# Altium PCB Sensorboard.PcbDoc
Units mm, origin at the board's own origin, x right, y up, seen from the top; angles counter-clockwise.
Board outline 26.67 x 26.67 mm, 2 copper layers (Top Layer, Bottom Layer), stack 1.586 mm thick; 47 components, 14 nets, 105 pads, 27 vias.
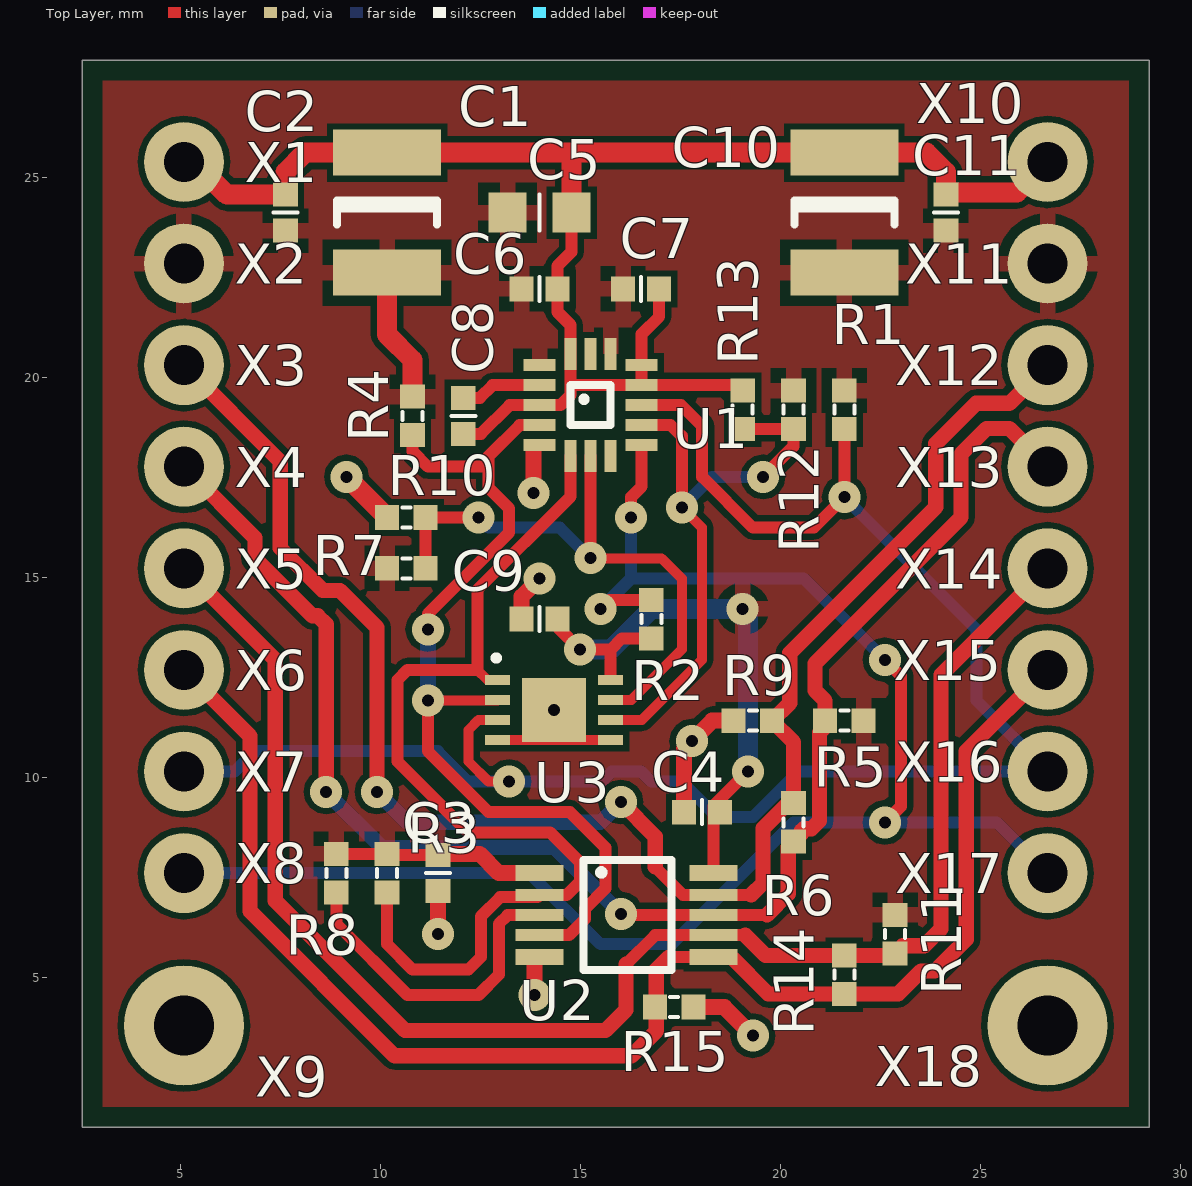
[diagram p0: Top Layer view]
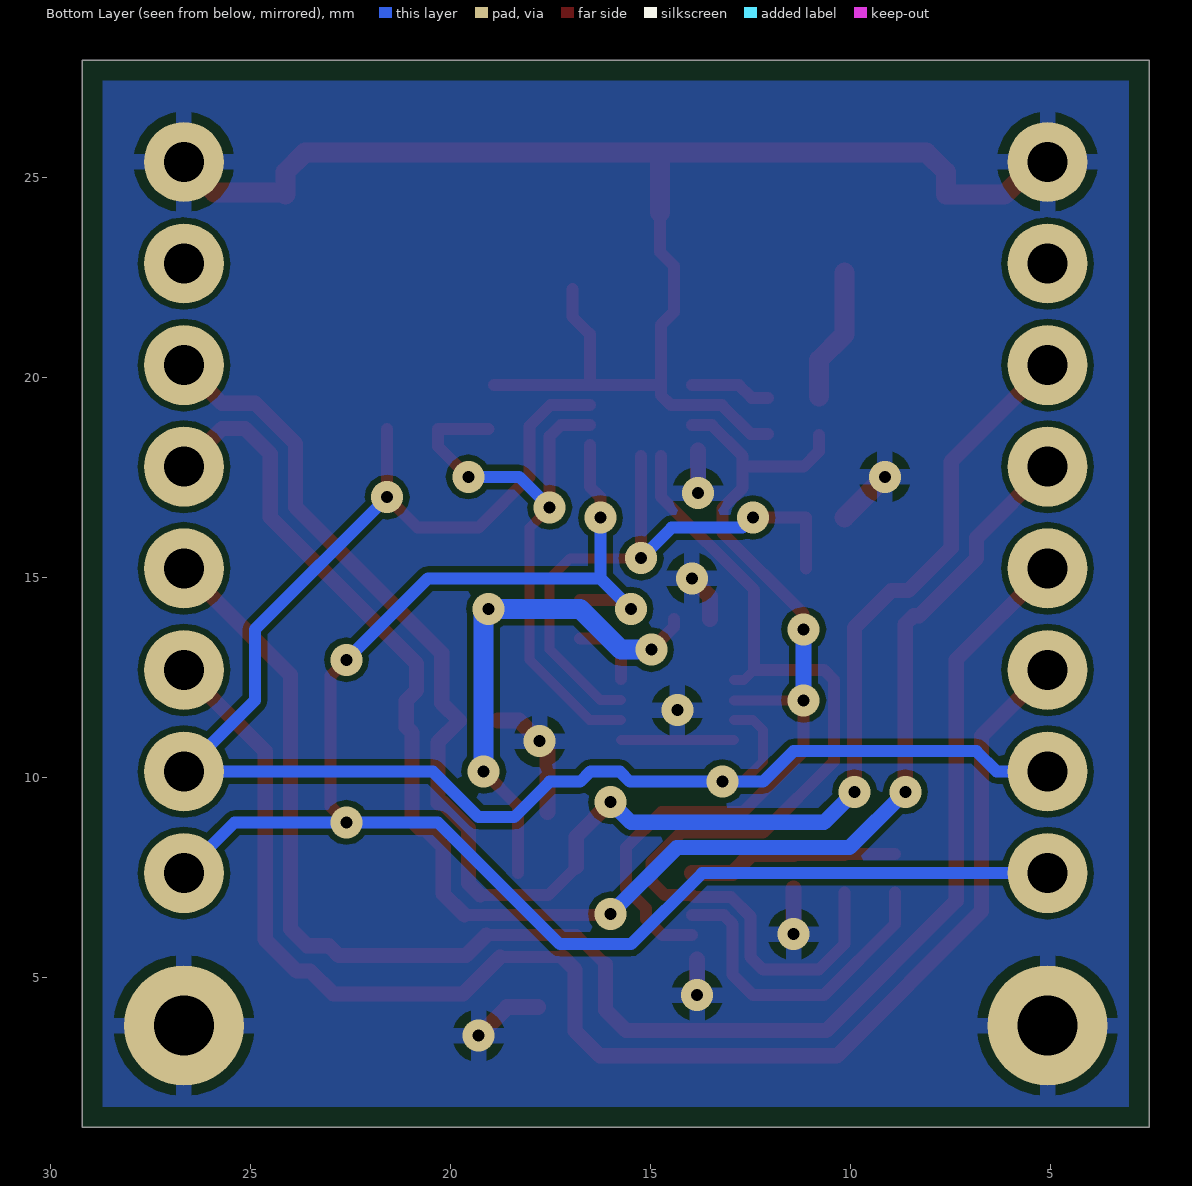
[diagram p1: Bottom Layer view, seen from below]

## Layer stack, top to bottom
Top Solder: solder mask 0.0102, Solder Resist, Dk 3.5
Top Layer: signal copper 0.018
Dielectric1: core 1.55, FR-4, Dk 4.8
Bottom Layer: signal copper 0.018
Bottom Solder: solder mask 0.0102, Solder Resist, Dk 3.5

## Board outline
2.54,1.27 2.54,27.94 29.21,27.94 29.21,1.27

## Design rules (kind name [scope] priority, off if disabled: settings)
Clearance Clearance-xPP-xTP-xTT [All] p1: gap=0.15
ComponentClearance [All] p1: gap=0.25 collisioncheckmode=3 verticalgap=0.25 showdistances=FALSE
DiffPairsRouting [All] p1: maxlimit=0.25 minlimit=0.25 mostfreqgap=0.25 toplayer_minwidth=0.381 toplayer_maxwidth=0.381 toplayer_prefwidth=0.381 bottomlayer_minwidth=0.381 bottomlayer_maxwidth=0.381 bottomlayer_prefwidth=0.381 maxuncoupledlength=12.5
Height [All] p1: minheight=0 maxheight=25 prefheight=12.5
HoleSize HoleSize-PTH [All] p1: absolutevalues=TRUE maxlimit=2 minlimit=0.25 maxpercent=80.000 minpercent=20.000
HoleToHoleClearance [All] p1: gap=0.15 allowstackedmicrovias=TRUE
MinimumAnnularRing "Minimum IAR  >0.45mm" [((ObjectKind = 'Pad') OR (ObjectKind = 'Via')) And (Layer = 'MultiLayer') And (HoleDiameter > AsMM(0.45))] p1: minimumring=0.25 // minimum inner annular ring for pads > 0.45mm finished hole size
MinimumAnnularRing "Minimum IAR <=0.45mm" [((ObjectKind = 'Pad') OR (ObjectKind = 'Via')) And (Layer = 'MultiLayer') And (HoleDiameter <= AsMM(0.45))] p2: minimumring=0.225 // minimum inner annular ring for pads <= 0.45mm finished hole size
MinimumSolderMaskSliver [All] p1: minsoldermaskwidth=0.1
PlaneClearance PlaneClearance-IPI [All] p1: clearance=0.4
PlaneConnect [All] p1: planeconnectstyle=Relief reliefexpansion=0.4 reliefentries=4 reliefconductorwidth=0.2 reliefairgap=0.2
PolygonConnect PolygonConnect-xTW [All] p1: connectstyle=Relief reliefconductorwidth=0.4 reliefentries=4 polygonreliefangle="90 Angle" airgapwidth=0.254
RoomDefinition Sensorboard [InComponentClass('Sensorboard')] p1: confinementstyle=ConfineIn formatcopy=TRUE lockcomponents=FALSE outline 0,0.48 29.21,0.48 29.21,27.94 0,27.94
RoutingCorners [All] p1: cornerstyle=45-Degree minsetback=2.5 maxsetback=2.5
RoutingVias "RoutingVias > 0.45mm" [(ObjectKind = 'Via') And (HoleDiameter > AsMM(0.45))] p1: holewidth=0.5 width=1 viastyle="Through Hole" minholewidth=0.45 minwidth=0.95 maxholewidth=0.9 maxwidth=1.4 // finishet hole size > 0.45mm
RoutingVias "RoutingVias <= 0.45mm" [(ObjectKind = 'Via') And (HoleDiameter <= AsMM(0.45))] p2: holewidth=0.3 width=0.8 viastyle="Through Hole" minholewidth=0.25 minwidth=0.7 maxholewidth=0.5 maxwidth=1 // finishet hole size <= 0.45mm
SilkToSilkClearance [All] p1: silktosilkclearance=0.2
SilkToSolderMaskClearance SilkscreenOverComponentPads [IsPad] p1: minsilkscreentomaskgap=0.2 clearancetoexposedcopper=TRUE
SolderMaskExpansion [All] p1: expansion=0.1
UnpouredPolygon [All] p1: allowunpoured=FALSE
Width Width-xTW [All] p1: maxlimit=1.5 minlimit=0.15 preferedwidth=0.2
18 further rules are at their usual default settings.

## Classes and differential pairs
differential pair DSDA: +DSDA_P -DSDA_N
differential pair DSCL: +DSCL_P -DSCL_N

## Components (designator, comment, footprint, x,y, rotation, side; value= is the part's Value field where it differs from the comment)
C1 "100uF" CAPC3225[1210]X120 10.16,24.13 r270 top
C2 "100nF" CAPC1005[0402]X50 7.62,24.13 r270 top
C3 "100nF" CAPC1005[0402]X50 11.43,7.62 r90 top
C4 "100nF" CAPC1005[0402]X50 18.034,9.144 r0 top
C5 "4.7uF" CAPC1608[0603]X80 13.97,24.13 r180 top
C6 "100nF" CAPC1005[0402]X50 13.97,22.225 r180 top
C7 "100nF" CAPC1005[0402]X50 16.51,22.225 r180 top
C8 "100nF" CAPC1005[0402]X50 12.065,19.05 r90 top
C9 "100nF" CAPC1005[0402]X50 13.97,13.97 r0 top
C10 "100uF" CAPC3225[1210]X120 21.59,24.13 r270 top
C11 "100nF" CAPC1005[0402]X50 24.13,24.13 r270 top
R1 "100k" RESC1005[0402]X35 21.59,19.205 r90 top
R2 "100k" RESC1005[0402]X35 16.764,13.97 r270 top
R3 "4k7" RESC1005[0402]X35 10.16,7.62 r90 top
R4 "4k7" RESC1005[0402]X35 10.795,19.05 r90 top
R5 "390" RESC1005[0402]X35 21.59,11.43 r0 top
R6 "120" RESC1005[0402]X35 20.32,8.89 r270 top
R7 "0" RESC1005[0402]X35 10.64,15.24 r180 top
R8 "100k" RESC1005[0402]X35 8.89,7.62 r270 top
R9 "390" RESC1005[0402]X35 19.304,11.43 r0 top
R10 "0" RESC1005[0402]X35 10.64,16.51 r180 top
R11 "390" RESC1005[0402]X35 22.86,6.096 r90 top
R12 "0" RESC1005[0402]X35 20.32,19.205 r90 top
R13 "0" RESC1005[0402]X35 19.05,19.205 r90 top
R14 "120" RESC1005[0402]X35 21.59,5.08 r90 top
R15 "390" RESC1005[0402]X35 17.337,4.27 r180 top
U1 "FXLS8471Q" "16 LEAD QFN" 13.97,20.32 r0 top
U2 "PCA9615" TSSOP10 13.97,7.62 r270 top
U3 "PCT2075TP" HWSON8 15.748,12.446 r270 top
X1 "Loch" Loch 5.08,25.4 r0 top
X2 "Loch" Loch 5.08,22.86 r0 top
X3 "Loch" Loch 5.08,20.32 r0 top
X4 "Loch" Loch 5.08,17.78 r0 top
X5 "Loch" Loch 5.08,15.24 r0 top
X6 "Loch" Loch 5.08,12.7 r0 top
X7 "Loch" Loch 5.08,10.16 r0 top
X8 "Loch" Loch 5.08,7.62 r0 top
X9 "Loch" "Loch _gross" 5.08,3.81 r0 top
X10 "Loch" Loch 26.67,25.4 r0 top
X11 "Loch" Loch 26.67,22.86 r0 top
X12 "Loch" Loch 26.67,20.32 r0 top
X13 "Loch" Loch 26.67,17.78 r0 top
X14 "Loch" Loch 26.67,15.24 r0 top
X15 "Loch" Loch 26.67,12.7 r0 top
X16 "Loch" Loch 26.67,10.16 r0 top
X17 "Loch" Loch 26.67,7.62 r0 top
X18 "Loch" "Loch _gross" 26.67,3.81 r0 top

## Footprints (in the part's own frame and the unit in brackets; to place one, negate y for a bottom-side part, rotate by r counter-clockwise, add the part's x,y. Pads: shape width x height; smd on the part's side, far side on the other; paste and mask are expansions set on the pad)
"16 LEAD QFN" [mm]
  rect 0.8x0.3 smd paste-0.015 mask+0.113: 1(0,0) 2(0,-0.5) 3(0,-1) 4(0,-1.5) 5(0,-2) 9(2.55,-2) 10(2.55,-1.5) 11(2.55,-1) 12(2.55,-0.5) 13(2.55,0)
  rect 0.3x0.8 smd paste-0.015 mask+0.113: 6(0.775,-2.275) 7(1.275,-2.275) 8(1.775,-2.275) 14(1.775,0.275) 15(1.275,0.275) 16(0.775,0.275)
  silkscreen extent 0.77,-1.5 1.78,-0.5
CAPC1005[0402]X50 [mm] "Chip Capacitor; 1.0x0.5mm"
  rect 0.6x0.62 smd: 1(-0.45,0) 2(0.45,0)
  silkscreen extent 0,-0.3 0,0.3, body extent -0.5,-0.25 0.5,0.25, height 0.5
CAPC1608[0603]X80 [mm] "Chip Capacitor; 1.6x0.8mm"
  rect 0.95x1 smd: 1(-0.8,0) 2(0.8,0)
  silkscreen extent 0,-0.45 0,0.45, body extent -0.8,-0.4 0.8,0.4, height 0.8
CAPC3225[1210]X120 [mm] "Chip Capacitor; 3.2x2.5 mm"
  rect 1.15x2.7 smd: 1(-1.5,0) 2(1.5,0)
  silkscreen extent -0.3,-1.25 0.3,1.25, body extent -1.6,-1.25 1.6,1.25, height 1.2
HWSON8 [mm]
  rect 0.25x0.625 smd: 1(0,-2.825) 2(0.5,-2.825) 3(1,-2.825) 4(1.5,-2.825) 5(1.5,0) 6(1,0) 7(0.5,0) 8(0,0)
  rect 1.6x1.6 smd paste-0.5: 9(0.75,-1.412)
  silkscreen extent -0.56,-2.87 -0.54,-2.85
Loch [mm] "Loch um Kabel einzulöten"
  round 2 hole 1 mask+0.113: 1(0,0)
"Loch _gross" [mm] "Loch um Kabel einzulöten"
  round 3 hole 1.5 mask+0.113: 1(0,0)
RESC1005[0402]X35 [mm] "Chip Resistor; 1x0.5mm"
  rect 0.6x0.62 smd: 1(-0.48,0) 2(0.48,0)
  silkscreen extent -0.1,-0.25 0.1,0.25, body extent -0.5,-0.25 0.5,0.25, height 0.35
TSSOP10 [mm]
  rect 0.4x1.2 smd: 1(0,0) 5(2.1,0) 6(2.1,4.35) 10(0,4.35)
  rect 0.3x1.2 smd: 2(0.55,0) 3(1.05,0) 4(1.55,0) 7(1.55,4.35) 8(1.05,4.35) 9(0.55,4.35)
  silkscreen extent -0.33,1.1 2.42,3.3

## Part data
C1 C2 C3 C4 C5 C6 C7 C8 C9 C10 C11: library part C, "Capacitor"
R1 R2 R3 R4 R5 R6 R7 R8 R9 R10 R11 R12 R13 R14 R15: library part R, "Resistor"
U1: "3-Axis,  Linear Accelerometer"
U2: "differential I2C-bus buffer"
U3: "Temperature_Sensor"
X1 X2 X3 X4 X5 X6 X7 X8 X9 X10 X11 X12 X13 X14 X15 X16 X17 X18: "Loch in Print um Kabel einzulöten"

## Via types
v1: diameter 0.8, hole 0.3, Top Layer to Bottom Layer, 27 vias

## Nets (pads, with @x,y where several pads share a name; then routed paths per layer and width w, separated by ;. In a path a pad name is that pad's centre, name@x,y a point inside that pad or via, vN(x,y) a via of type N, cw(c..) or ccw(c..) an arc to the next point about the centre after c; other vN are vias at no path point)
3V3: C1.2 C2.2 C3.2 C4.2 C5.2 C6.2 C7.2 C9.2 C10.2 C11.2 R1.2 R2.2 R3.2 R4.2 R5.2 R7.2 R8.1 R11.2 R12.2 U1.1 U1.14 U2.1 U2.10 U3.8 X2.1 X11.1 | length 23.7
  Top Layer w0.3: R8.1 R3.2@10.13,8.1 ; R3.2@10.16,8.07 C3.2@11.4,8.07 ; C9.2 14.42,13.774 v1(14.986,13.208) 15.748,13.208 ; U3.8@15.748,12.471 15.748,13.208 ; R2.2 16.03,13.49 15.748,13.208 ; U2.10 18.32,9.303 v1(19.177,10.16)
  Top Layer w0.4: C3.2@11.43,8.1 12.474,8.1 12.954,7.62 U2.1
  Top Layer w0.5: C1.2 10.16,21.082 10.795,20.447 R4.2
  Bottom Layer w0.5: v1(14.986,13.208) 15.748,13.208 16.764,14.224 v1(19.05,14.224) 19.177,14.097 v1(19.177,10.16)
DSCL_N: R14.1 R15.2 U2.6 X6.1 X15.1 | length 36.6
  Top Layer w0.3: 17.204,5.52 U2.6 U2.6@18.768,5.52
  Top Layer w0.381: X6.1 6.731,11.049 6.731,6.669 10.348,3.052 16.267,3.052 16.891,3.676 16.891,5.207 17.204,5.52 ; U2.6@18.768,5.52 19.688,4.6 R14.1 22.936,4.6 23.511,5.176 23.852,5.176 24.638,5.962 24.638,10.668 X15.1
DSCL_P: R11.1 R14.2 U2.7 X5.1 X14.1 | length 39.5
  Top Layer w0.3: 16.133,5.341 16.862,6.07 U2.7 19.11,6.07
  Top Layer w0.381: X5.1 7.362,12.958 7.362,6.93 10.609,3.683 15.621,3.683 16.133,4.195 16.133,5.341 ; 19.11,6.07 19.62,5.56 R14.2 22.804,5.56 R11.1 23.05,5.807 23.591,5.807 24.007,6.223 24.007,12.577 X14.1
DSDA_N: R6.1 R9.2 U2.9 X3.1 X12.1 | length 41.5
  Top Layer w0.3: 16.862,7.77 17.562,7.07 U2.9 19.262,7.07
  Top Layer w0.381: X3.1 7.489,17.911 7.489,15.748 8.554,14.684 8.984,14.684 9.906,13.762 9.906,13.716 v1(9.906,9.652) ; v1(16.002,9.398) 16.862,8.538 16.862,7.77 ; 19.262,7.07 19.558,7.366 19.558,8.74 20.188,9.37 R6.1 20.32,10.894 R9.2 20.227,11.873 20.227,13.124 23.878,16.775 23.878,18.359 24.885,19.365 25.715,19.365 X12.1
  Bottom Layer w0.381: v1(9.906,9.652) 10.668,8.89 15.494,8.89 v1(16.002,9.398)
DSDA_P: R5.1 R6.2 U2.8 X4.1 X13.1 | length 38.7
  Top Layer w0.3: v1@16.036,6.57 U2.8 19.654,6.57
  Top Layer w0.381: X4.1 6.858,16.002 6.858,15.487 8.292,14.053 8.426,14.053 8.636,13.843 v1(8.636,9.652) ; v1(16.002,6.604) v1@16.036,6.57 ; 19.654,6.57 20.189,7.105 20.189,8.279 R6.2 20.511,8.601 20.511,8.668 20.572,8.729 20.771,8.729 20.97,8.929 20.97,11.136 21.11,11.275 R5.1 21.11,11.93 20.858,12.183 20.858,12.863 24.509,16.514 24.509,18.097 25.146,18.734 25.716,18.734 X13.1
  Bottom Layer w0.381: v1(8.636,9.652) 10.029,8.259 14.347,8.259 v1(16.002,6.604)
GND: C1.1 C2.1 C3.1 C4.1 C5.1 C6.1 C7.1 C8.1 C9.1 C10.1 C11.1 R9.1 R10.2 R13.2 R15.1 U1.3 U1.5 U1.12 U1.13 U1.16 U2.5 U3.4 U3.5 U3.9 X1.1 X9.1 X10.1 X18.1 | length 53.1
  Top Layer w0.25: U3.4 U3.5
  Top Layer w0.3: C8.1 12.504,18.6 13.224,19.32 U1.3 14.494,19.32 14.745,19.571 U1.16 14.745,21.323 14.42,21.648 C6.1 14.42,22.802 14.77,23.152 C5.1 ; 14.753,19.82 U1.12 ; C7.1 16.96,21.532 16.52,21.092 U1.13 U1.12 ; R13.2@18.915,19.82 U1.12
  Top Layer w0.4: v1(11.43,6.096) C3.1 C3.1@11.43,7.239 ; C9.1 13.52,14.536 v1(13.97,14.986) ; v1(13.818,17.12) U1.5@13.818,18.186 ; v1@13.834,4.572 v1(13.843,4.572) U2.5@13.843,5.461 ; C4.1 17.584,10.726 18.288,11.43 R9.1 ; R15.1 18.59,4.27 v1(19.304,3.556)
  Top Layer w0.5: X1.1@5.334,25.4 6.154,24.58 C2.1 7.62,25.146 8.104,25.63 C1.1 14.77,25.63 ; v1(9.144,17.526) R10.2 ; C5.1 14.77,25.63 ; C10.1@21.562,25.63 14.77,25.63 ; C10.1 23.646,25.63 24.13,25.146 C11.1 ; C11.1@24.188,24.638 25.908,24.638 X10.1
  other v1: 17.78,10.922 14.336,11.696
INT1: R1.1 U1.11 U3.3 X7.1 X16.1 | length 44.1
  Top Layer w0.25: U3.3 12.44,11.446 12.192,11.198 12.192,10.414 12.7,9.906 v1(13.208,9.906)
  Top Layer w0.3: U1.11 17.51,19.32 18.034,18.796 18.034,17.526 19.304,16.256 20.828,16.256 v1(21.59,17.018) R1.1
  Bottom Layer w0.3: X7.1 6.35,10.16 6.858,10.668 11.43,10.668 12.192,9.906 15.52,9.906 15.774,10.16 16.51,10.16 16.764,9.906 17.526,9.906 18.415,9.017 19.304,9.017 20.447,10.16 X16.1 24.892,11.938 24.892,13.716 v1(21.59,17.018)
INT2: R2.1 U1.9 X8.1 X17.1 | length 41.6
  Top Layer w0.3: v1(15.494,14.224) 15.72,14.45 R2.1 ; v1(16.256,16.51) 16.256,17.018 16.52,17.282 U1.9 ; v1(22.606,8.89) 23.003,9.287 23.003,12.557 v1(22.606,12.954)
  Bottom Layer w0.3: X8.1 13.716,7.62 15.494,5.842 17.272,5.842 20.32,8.89 v1(22.606,8.89) 25.4,8.89 X17.1 ; v1(15.494,14.224) 16.256,14.986 ; v1(16.256,16.51) 16.256,14.986 ; v1(22.606,12.954) 20.574,14.986 16.256,14.986
NetC8_2: C8.2 U1.2 | length 2
  Top Layer w0.3: C8.2 12.478,19.5 12.798,19.82 U1.2
NetR7_1: R7.1 R10.1 U1.7 U3.7 | length 14.9
  Top Layer w0.25: v1@15.245,15.489 17.023,15.489 17.526,14.986 17.526,13.208 16.264,11.946 U3.7
  Top Layer w0.3: R7.1 R10.1 v1(12.446,16.51) ; v1@15.245,15.489 U1.7
  Bottom Layer w0.3: v1(12.446,16.51) 12.7,16.256 14.478,16.256 v1(15.24,15.494)
NetR8_2: R8.2 U2.3 | length 8.2
  Top Layer w0.3: R8.2 8.89,6.35 10.668,4.572 12.446,4.572 12.954,5.08 12.954,6.35 13.174,6.57 U2.3
NetR12_1: R12.1 R13.1 U1.10 U3.6 | length 15
  Top Layer w0.25: U3.6 16.526,11.446 18.034,12.954 18.034,16.256 v1(17.526,16.764)
  Top Layer w0.3: U1.10 17.248,18.82 17.526,18.542 v1(17.526,16.764) ; R13.1 R12.1 20.32,18.288 v1(19.558,17.526)
  Bottom Layer w0.3: v1(17.526,16.764) 18.288,17.526 v1(19.558,17.526)
SCL: R4.1 U1.4 U2.4 U3.2 | length 23
  Top Layer w0.25: v1(11.176,11.938) U3.2@12.915,11.938
  Top Layer w0.3: R4.1 10.795,18.161 11.176,17.78 12.7,17.78 ; v1(11.176,11.938) 11.176,10.668 12.7,9.144 14.732,9.144 15.621,8.255 15.621,7.239 15.113,6.731 15.113,6.477 14.706,6.07 U2.4 ; v1(11.176,13.716) 11.176,14.098 13.208,16.13 13.208,16.739 12.7,17.247 12.7,17.78 ; U1.4 13.473,18.82 12.7,18.047 12.7,17.78
  Bottom Layer w0.4: v1(11.176,11.938) v1(11.176,13.716)
SDA: R3.1 U1.6 U2.2 U3.1 | length 25.1
  Top Layer w0.25: 12.415,12.7 12.669,12.446 U3.1
  Top Layer w0.3: R3.1 10.16,5.842 10.795,5.207 12.192,5.207 12.504,5.519 12.504,6.536 12.988,7.02 13.92,7.02 U2.2 14.644,7.07 14.986,7.412 14.986,7.887 14.237,8.636 12.192,8.636 10.414,10.414 10.414,12.446 10.668,12.7 12.415,12.7 12.415,14.701 14.745,17.031 U1.6
pads on no net: U1.8 U1.15

## Polygon pours and split planes (outlines as drawn)
GND on Bottom Layer "Bottom Layer-GND" (solid, remove dead copper, pour order 2): 3.048,1.778 28.702,1.778 28.702,27.432 3.048,27.432 3.048,1.778
3V3 on Top Layer "Top Layer-3V3" (solid, remove dead copper, pour order 4): 3.048,1.778 28.956,1.778 28.702,1.778 28.702,27.432 3.048,27.432

## Silkscreen, mask and mechanical layers (free items; w line width, h text height)
Mechanical 1:
  the board outline again, w0.2
  text ".Pcb_File_Name_No_Path" at 2.54,0.381 h1